# EAGLE board C64_1 (EAGLE 5.12)
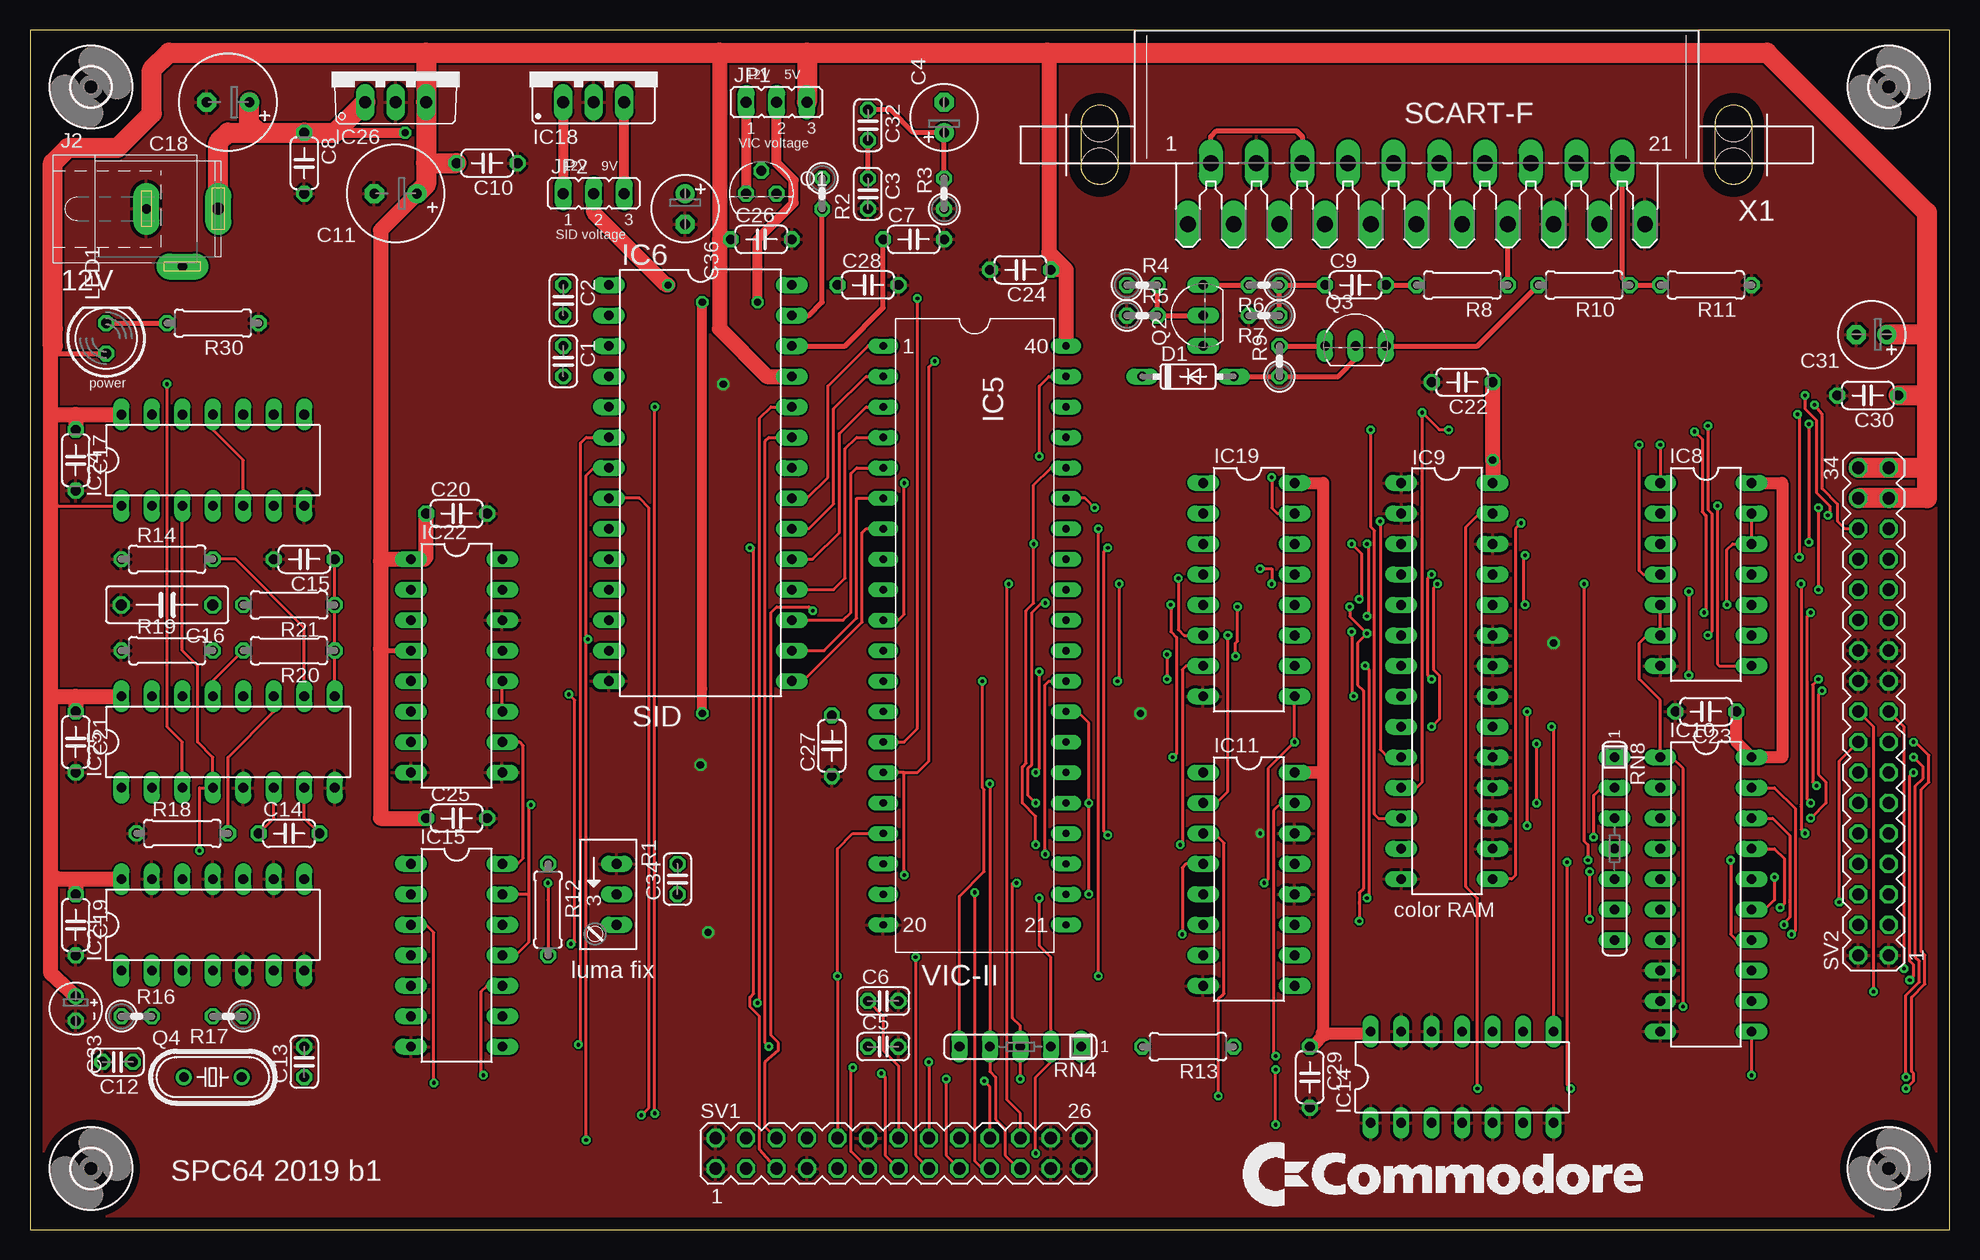
[diagram p0: board, top side]
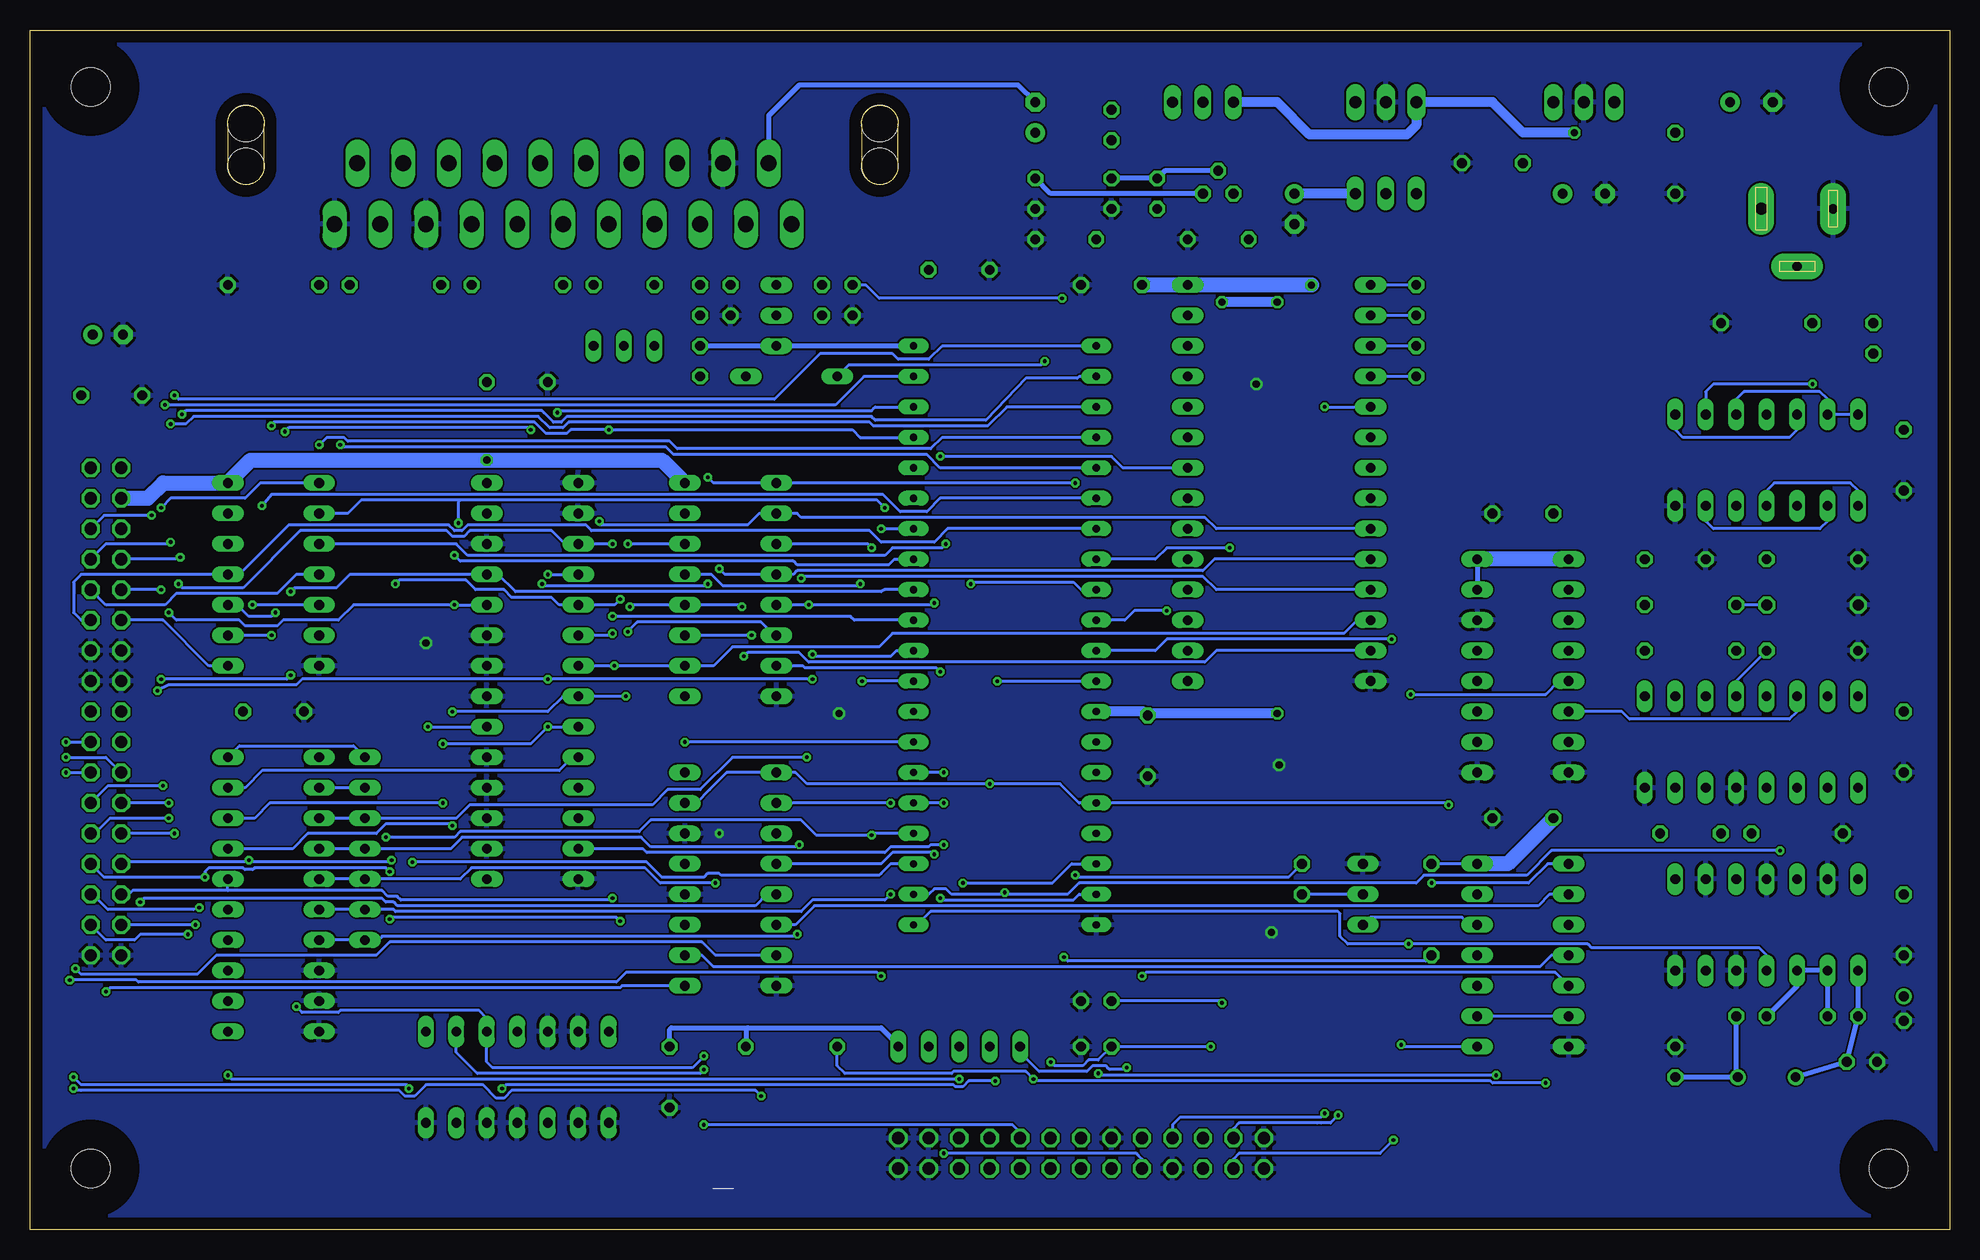
[diagram p1: board, bottom side, seen from below]

Size 160 x 100 mm. Coordinates in mm from the lower left corner, seen from the top.
Outline: 0,0 160,0 160,100 0,100 0,0
Copper layers (1*16): Top 0.035mm / dielectric 1.5mm / Bottom 0.035mm
Design rules "default *": minimum track width 10mil, minimum drill 12mil, track to track 6mil, track to pad 6mil, pad to pad 6mil, via to via 6mil, smd to smd 6mil, copper to edge 40mil, drill to drill 8mil, minimum pad ring 10mil, minimum via ring 8mil, stop-mask expansion 4mil, vias tented up to drill 0mil, thermal gap 10mil

## Footprints (pad centres in the part's own frame; a part is rotated, then mirrored left to right if it is on the bottom)
C025-024X044 = drill 0.813 octagon: 1 -1.27,0; 2 1.27,0
E2,5-6 = drill 0.813 pad 1.6 round: + -1.27,0 | drill 0.813 pad 1.6 octagon: - 1.27,0
C050-024X044 = drill 0.813 octagon: 1 -2.54,0; 2 2.54,0
E3,5-8 = drill 0.813 pad 1.6 round: + -1.778,0 | drill 0.813 pad 1.6 octagon: - 1.778,0
C075-032X103 = drill 0.914 octagon: 1 -3.81,0; 2 3.81,0
E2-4 = drill 0.813 pad 1.27 round: + -1.016,0 | drill 0.813 pad 1.27 octagon: - 1.016,0
DO35-7 = drill 0.813 long: A 3.81,0; C -3.81,0
DIP40 = drill 0.61 pad 1.27 long: 1 -24.13,-7.62; 2 -21.59,-7.62; 3 -19.05,-7.62; 4 -16.51,-7.62; 5 -13.97,-7.62; 6 -11.43,-7.62; 7 -8.89,-7.62; 8 -6.35,-7.62; 9 -3.81,-7.62; 10 -1.27,-7.62; 11 1.27,-7.62; 12 3.81,-7.62; 13 6.35,-7.62; 14 8.89,-7.62; 15 11.43,-7.62; 16 13.97,-7.62; 17 16.51,-7.62; 18 19.05,-7.62; 19 21.59,-7.62; 20 24.13,-7.62; 21 24.13,7.62; 22 21.59,7.62; 23 19.05,7.62; 24 16.51,7.62; 25 13.97,7.62; 26 11.43,7.62; 27 8.89,7.62; 28 6.35,7.62; 29 3.81,7.62; 30 1.27,7.62; 31 -1.27,7.62; 32 -3.81,7.62; 33 -6.35,7.62; 34 -8.89,7.62; 35 -11.43,7.62; 36 -13.97,7.62; 37 -16.51,7.62; 38 -19.05,7.62; 39 -21.59,7.62; 40 -24.13,7.62
DIL28 = drill 0.813 long: 1 -16.51,-7.62; 2 -13.97,-7.62; 3 -11.43,-7.62; 4 -8.89,-7.62; 5 -6.35,-7.62; 6 -3.81,-7.62; 7 -1.27,-7.62; 8 1.27,-7.62; 9 3.81,-7.62; 10 6.35,-7.62; 11 8.89,-7.62; 12 11.43,-7.62; 13 13.97,-7.62; 14 16.51,-7.62; 15 16.51,7.62; 16 13.97,7.62; 17 11.43,7.62; 18 8.89,7.62; 19 6.35,7.62; 20 3.81,7.62; 21 1.27,7.62; 22 -1.27,7.62; 23 -3.81,7.62; 24 -6.35,7.62; 25 -8.89,7.62; 26 -11.43,7.62; 27 -13.97,7.62; 28 -16.51,7.62
DIL14 = drill 0.813 long: 1 -7.62,-3.81; 2 -5.08,-3.81; 3 -2.54,-3.81; 4 0,-3.81; 5 2.54,-3.81; 6 5.08,-3.81; 7 7.62,-3.81; 8 7.62,3.81; 9 5.08,3.81; 10 2.54,3.81; 11 0,3.81; 12 -2.54,3.81; 13 -5.08,3.81; 14 -7.62,3.81
DIL28-3 = drill 0.813 long: 1 -16.51,-3.81; 2 -13.97,-3.81; 3 -11.43,-3.81; 4 -8.89,-3.81; 5 -6.35,-3.81; 6 -3.81,-3.81; 7 -1.27,-3.81; 8 1.27,-3.81; 9 3.81,-3.81; 10 6.35,-3.81; 11 8.89,-3.81; 12 11.43,-3.81; 13 13.97,-3.81; 14 16.51,-3.81; 15 16.51,3.81; 16 13.97,3.81; 17 11.43,3.81; 18 8.89,3.81; 19 6.35,3.81; 20 3.81,3.81; 21 1.27,3.81; 22 -1.27,3.81; 23 -3.81,3.81; 24 -6.35,3.81; 25 -8.89,3.81; 26 -11.43,3.81; 27 -13.97,3.81; 28 -16.51,3.81
DIL20 = drill 0.813 long: 1 -11.43,-3.81; 2 -8.89,-3.81; 3 -6.35,-3.81; 4 -3.81,-3.81; 5 -1.27,-3.81; 6 1.27,-3.81; 7 3.81,-3.81; 8 6.35,-3.81; 9 8.89,-3.81; 10 11.43,-3.81; 11 11.43,3.81; 12 8.89,3.81; 13 6.35,3.81; 14 3.81,3.81; 15 1.27,3.81; 16 -1.27,3.81; 17 -3.81,3.81; 18 -6.35,3.81; 19 -8.89,3.81; 20 -11.43,3.81
DIL16 = drill 0.813 long: 1 -8.89,-3.81; 2 -6.35,-3.81; 3 -3.81,-3.81; 4 -1.27,-3.81; 5 1.27,-3.81; 6 3.81,-3.81; 7 6.35,-3.81; 8 8.89,-3.81; 9 8.89,3.81; 10 6.35,3.81; 11 3.81,3.81; 12 1.27,3.81; 13 -1.27,3.81; 14 -3.81,3.81; 15 -6.35,3.81; 16 -8.89,3.81
78XXS = drill 1.016 long: GND 0,-2.54; IN -2.54,-2.54; OUT 2.54,-2.54
TO220V = drill 1.016 long: 1 -2.54,-2.54; 2 0,-2.54; 3 2.54,-2.54
SPC4077 = drill 0.8 pad 2.184 long: 1 -3,0; 2 0,-4.8 | drill 1 pad 2.184 long: 3 3,0
JP2 = drill 0.914 long: 1 -2.54,0; 2 0,0; 3 2.54,0
LED5MM = drill 0.813 octagon: A -1.27,0; K 1.27,0
TO92 = drill 0.813 octagon: 1 1.27,0; 2 0,1.905; 3 -1.27,0
TO92-EBC = drill 0.813 long: B 0,-1.27; C -2.54,-1.27; E 2.54,-1.27
HC49/S = drill 0.813 round: 1 -2.413,0; 2 2.413,0
RJ9W = drill 0.813 long: A 2.54,0.635; E -2.54,0.635; S 0,0.635
0207/2V = drill 0.813 octagon: 1 -1.27,0; 2 1.27,0
0207/7 = drill 0.813 octagon: 1 -3.81,0; 2 3.81,0
SIL5 = drill 0.813 long: 1 -5.08,0; 2 -2.54,0; 3 0,0; 4 2.54,0; 5 5.08,0
SIL7 = drill 0.813 long: 1 -7.62,0; 2 -5.08,0; 3 -2.54,0; 4 0,0; 5 2.54,0; 6 5.08,0; 7 7.62,0
MA13-2 = drill 1.016 octagon: 1 -15.24,-1.27; 2 -15.24,1.27; 3 -12.7,-1.27; 4 -12.7,1.27; 5 -10.16,-1.27; 6 -10.16,1.27; 7 -7.62,-1.27; 8 -7.62,1.27; 9 -5.08,-1.27; 10 -5.08,1.27; 11 -2.54,-1.27; 12 -2.54,1.27; 13 0,-1.27; 14 0,1.27; 15 2.54,-1.27; 16 2.54,1.27; 17 5.08,-1.27; 18 5.08,1.27; 19 7.62,-1.27; 20 7.62,1.27; 21 10.16,-1.27; 22 10.16,1.27; 23 12.7,-1.27; 24 12.7,1.27; 25 15.24,-1.27; 26 15.24,1.27
MA17-2 = drill 1.016 octagon: 1 -20.32,-1.27; 2 -20.32,1.27; 3 -17.78,-1.27; 4 -17.78,1.27; 5 -15.24,-1.27; 6 -15.24,1.27; 7 -12.7,-1.27; 8 -12.7,1.27; 9 -10.16,-1.27; 10 -10.16,1.27; 11 -7.62,-1.27; 12 -7.62,1.27; 13 -5.08,-1.27; 14 -5.08,1.27; 15 -2.54,-1.27; 16 -2.54,1.27; 17 0,-1.27; 18 0,1.27; 19 2.54,-1.27; 20 2.54,1.27; 21 5.08,-1.27; 22 5.08,1.27; 23 7.62,-1.27; 24 7.62,1.27; 25 10.16,-1.27; 26 10.16,1.27; 27 12.7,-1.27; 28 12.7,1.27; 29 15.24,-1.27; 30 15.24,1.27; 31 17.78,-1.27; 32 17.78,1.27; 33 20.32,-1.27; 34 20.32,1.27
3,2 = hole 3.2: 0,0
SCART-F = drill 1.321 long: 1 19.05,5.08; 2 17.145,0; 3 15.24,5.08; 4 13.335,0; 5 11.43,5.08; 6 9.525,0; 7 7.62,5.08; 8 5.715,0; 9 3.81,5.08; 10 1.905,0; 11 0,5.08; 12 -1.905,0; 13 -3.81,5.08; 14 -5.715,0; 15 -7.62,5.08; 16 -9.525,0; 17 -11.43,5.08; 18 -13.335,0; 19 -15.24,5.08; 20 -17.145,0; 21 -19.05,5.08 | hole 3.023: 26.416,0.254; 26.416,-3.302; -26.416,0.254; -26.416,-3.302

## Placement (x,y rotation side)
C1  2n2  [C025-024X044]  44.45,72.39 270 top
C2  2n2  [C025-024X044]  44.45,77.47 270 top
C3  1n  [C025-024X044]  69.85,86.36 270 top
C4  10µ  [E2,5-6]  76.2,92.71 90 top
C5  1n8  [C025-024X044]  71.12,15.24 0 top
C6  1n8  [C025-024X044]  71.12,19.05 0 top
C7  47n  [C050-024X044]  73.66,82.55 0 top
C8  100n  [C050-024X044]  22.86,88.9 270 top
C9  470p  [C050-024X044]  110.49,78.74 0 top
C10  100n  [C050-024X044]  38.1,88.9 180 top
C11  470µ  [E3,5-8]  30.48,86.36 180 top
C12  12p  [C025-024X044]  7.3,13.97 180 top
C13  12p  [C025-024X044]  22.86,13.97 90 top
C14  220p  [C050-024X044]  21.59,33.02 0 top
C15  680p  [C050-024X044]  22.86,55.88 180 top
C16  330n  [C075-032X103]  11.43,52.07 180 top
C17  100n  [C050-024X044]  3.81,64.14 270 top
C18  470µ  [E3,5-8]  16.51,93.98 180 top
C19  100n  [C050-024X044]  3.81,25.4 270 top
C20  100n  [C050-024X044]  35.56,59.69 0 top
C21  100n  [C050-024X044]  3.81,40.64 270 top
C22  100n  [C050-024X044]  119.38,70.64 180 top
C23  100n  [C050-024X044]  139.7,43.18 180 top
C24  100n  [C050-024X044]  82.55,80.01 180 top
C25  100n  [C050-024X044]  35.56,34.29 0 top
C26  100n  [C050-024X044]  60.96,82.55 0 top
C27  100n  [C050-024X044]  66.83,40.32 90 top
C28  100n  [C050-024X044]  69.85,78.74 0 top
C29  100n  [C050-024X044]  106.68,12.7 270 top
C30  100n  [C050-024X044]  153.19,69.53 180 top
C31  100µ  [E2,5-6]  153.51,74.61 180 top
C32  470p  [C025-024X044]  69.85,92.08 270 top
C33  10µ  [E2-4]  3.81,18.41 270 top
C34  47p  [C025-024X044]  53.98,29.21 90 top
C36  100µ  [E2,5-6]  54.61,85.09 270 top
D1  1N4148  [DO35-7]  96.52,71.12 0 top
IC5  6569 VIC-II  [DIP40]  78.74,49.53 270 top
IC6  6582/8580 SID  [DIL28]  55.88,62.23 270 top
IC8  74HC4066  [DIL14]  139.7,54.61 270 top
IC9  61256  [DIL28-3]  118.11,45.72 270 top
IC10  74HC573  [DIL20]  139.7,27.94 270 top
IC11  74HC367  [DIL16]  101.6,29.21 270 top
IC14  74HC08  [DIL14]  119.38,12.7 0 top
IC15  74HC04  [DIL14]  35.56,22.86 270 top
IC18  7809  [78XXS]  46.99,96.52 0 top
IC19  74HC367  [DIL16]  101.6,53.34 270 top
IC21  74HCU04  [DIL14]  15.24,25.4 0 top
IC22  74HC193  [DIL16]  35.56,46.99 270 top
IC24  74HC74  [DIL14]  15.24,64.14 0 top
IC25  74HC4046  [DIL16]  16.51,40.64 0 top
IC26  7805TV  [TO220V]  30.48,96.52 0 top
J2  12V  [SPC4077]  12.7,85.09 0 top
JP1  VIC voltage  [JP2]  62.23,93.98 0 top
JP2  SID voltage  [JP2]  46.99,86.36 0 top
LED1  power  [LED5MM]  6.35,74.3 90 top
Q1  BC337-40  [TO92]  60.96,86.36 0 top
Q2  BC550  [TO92-EBC]  96.52,76.2 90 top
Q3  BC550  [TO92-EBC]  110.49,74.93 0 top
Q4  17.73447 MHz  [HC49/S]  15.24,12.7 0 top
R1  2K2  [RJ9W]  48.26,27.94 270 top
R2  10K  [0207/2V]  66.04,86.36 270 top
R3  1K  [0207/2V]  76.2,86.36 90 top
R4  510  [0207/2V]  92.71,78.74 0 top
R5  510  [0207/2V]  92.71,76.2 0 top
R6  68  [0207/2V]  102.87,78.74 180 top
R7  270  [0207/2V]  102.87,76.2 180 top
R8  300  [0207/7]  119.38,78.74 180 top
R9  1K  [0207/2V]  104.14,72.39 90 top
R10  150  [0207/7]  129.54,78.74 180 top
R11  150  [0207/7]  139.7,78.74 180 top
R12  3K3  [0207/7]  43.18,26.67 270 top
R13  3K3  [0207/7]  96.52,15.24 180 top
R14  10K  [0207/7]  11.43,55.88 0 top
R16  1M  [0207/2V]  8.89,17.78 0 top
R17  470  [0207/2V]  16.51,17.78 180 top
R18  10K  [0207/7]  12.7,33.02 0 top
R19  5K6  [0207/7]  11.43,48.26 0 top
R20  1K5  [0207/7]  21.59,48.26 180 top
R21  3K3  [0207/7]  21.59,52.07 180 top
R30  470  [0207/7]  15.24,75.56 180 top
RN4  3K3  [SIL5]  82.55,15.24 180 top
RN8  3K3  [SIL7]  132.08,31.75 270 top
SV1  [MA13-2]  72.39,6.35 0 top
SV2  [MA17-2]  153.67,43.18 90 top
U$1  [3,2]  154.94,5.08 0 top
U$2  [3,2]  5.08,5.08 0 top
U$3  [3,2]  5.08,95.25 0 top
U$4  [3,2]  154.94,95.25 0 top
X1  SCART-F  [SCART-F]  115.57,88.9 180 top

## Library data of the parts
C1-C34 C36 R2-R14 R16-R21 R30 = rcl
D1 = diode
IC5 IC6 = 0RB_65xx
IC8 IC25 = 40xx
IC9 = memory-hitachi; OC_FARNELL: unknown; OC_NEWARK: unknown
IC10 IC11 IC14 IC15 IC19 IC21 IC22 IC24 = 74xx-us
IC18 = v-reg
IC26 = linear
J2 = con-jack; OC_FARNELL: unknown; OC_NEWARK: unknown
JP1 JP2 = jumper
LED1 = led
Q1-Q3 = transistor-npn
Q4 = crystal; OC_FARNELL: 1667008; OC_NEWARK: unknown
R1 = pot
RN4 RN8 = resistor-sil; OC_FARNELL: unknown; OC_NEWARK: unknown
SV1 SV2 = con-lstb; OC_FARNELL: unknown; OC_NEWARK: unknown
U$1-U$4 = holes
X1 = con-hirschmann; OC_FARNELL: unknown; OC_NEWARK: unknown

## Nets
/AEC: IC15.10 SV1.13
/BA: IC5.12 RN4.5 SV1.11
/CAS: IC5.19 RN4.2 SV1.9
/COLOR: IC14.9 SV1.18
/CS_COLOR: IC9.20 IC14.8
/IRQ: IC5.8 SV1.5
/RAS: IC5.18 IC10.11 RN4.3
/RESET: IC6.5 SV1.8
/SID: IC6.8 SV1.4
/VA14: IC15.1 R12.2 SV1.15
/VA15: IC15.3 R13.2 SV1.17
/VIC: IC5.10 IC19.1 IC19.15 SV1.6
A0: IC6.9 IC9.10 IC10.19 IC19.2 SV2.3
A1: IC6.10 IC9.9 IC10.18 IC19.4 SV2.4
A2: IC6.11 IC9.8 IC10.17 IC19.6 SV2.5
A3: IC6.12 IC9.7 IC10.16 IC19.10 SV2.6
A4: IC6.13 IC9.6 IC10.15 IC19.12 SV2.7
A5: IC9.5 IC10.14 IC19.14 SV2.8
A6: IC5.30 IC9.4 SV2.9
A7: IC5.31 IC9.3 SV2.10
A8: IC5.32 IC9.25 SV2.11
A9: IC5.33 IC9.24 SV2.12
A10: IC5.34 SV2.13
A11: IC5.23 SV2.14
A12: IC11.3 SV2.15
A13: IC11.5 SV2.16
A14: IC11.7 SV2.17
A15: IC11.9 SV2.18
AEC: IC5.16 IC8.5 IC8.6 IC8.12 IC8.13 IC10.1 IC11.1 IC11.15 IC14.10 IC15.11 IC15.13 RN4.4 SV1.21
AUDIO_OUT: C4.- X1.2 X1.6
COLCLK: IC5.21 IC21.4 IC22.5
COLCLK/9: IC22.6 IC25.14
COLOR: IC5.14 R4.1
COLOR_OUT: R8.1 X1.15
D0: IC5.7 IC6.15 IC8.11 SV2.23
D1: IC5.6 IC6.16 IC8.8 SV2.24
D2: IC5.5 IC6.17 IC8.4 SV2.25
D3: IC5.4 IC6.18 IC8.1 SV2.26
D4: IC5.3 IC6.19 SV2.27
D5: IC5.2 IC6.20 SV2.28
D6: IC5.1 IC6.21 SV2.29
D7: IC5.39 IC6.22 SV2.30
D8: IC5.38 IC8.10 IC9.11
D9: IC5.37 IC8.9 IC9.12
D10: IC5.36 IC8.3 IC9.13
D11: IC5.35 IC8.2 IC9.15
DOTCLK: IC5.22 IC24.3 IC25.4 SV1.19
EXT-IN: C7.1 IC6.26
GND: C3.2 C5.2 C6.2 C7.2 C8.2 C10.1 C11.- C12.2 C13.2 C15.2 C16.2 C17.2 C18.- C19.2 C20.2 C21.2 C22.2 C23.2 C24.2 C25.2 C26.2 C27.1 C28.2 C29.2 C30.2 C31.- C33.- C36.- IC5.20 IC6.14 IC8.7 IC9.1 IC9.2 IC9.14 IC9.16 IC9.17 IC9.18 IC9.19 IC9.21 IC9.22 IC9.23 IC9.26 IC10.8 IC10.9 IC10.10 IC11.8 IC11.12 IC11.14 IC14.1 IC14.2 IC14.4 IC14.5 IC14.7 IC14.12 IC14.13 IC15.7 IC18.GND IC19.8 IC21.5 IC21.7 IC21.9 IC21.11 IC21.13 IC22.8 IC22.9 IC22.14 IC24.7 IC25.5 IC25.8 IC26.2 J2.1 R1.E R3.1 R5.1 R7.2 R11.1 R14.1 R18.1 R19.1 R30.1 SV1.1 SV1.2 SV1.7 SV1.12 SV1.23 SV1.24 SV1.25 SV1.26 SV2.1 SV2.2 SV2.19 SV2.20 SV2.21 SV2.22 X1.4 X1.17 X1.21
GR/W: IC9.27 SV1.20
LUM_SYNC_OUT: R10.1 R11.2 X1.20
MA0: IC5.24 IC10.2 IC19.3 RN8.2
MA1: IC5.25 IC10.3 IC19.5 RN8.3
MA2: IC5.26 IC10.4 IC19.7 RN8.4
MA3: IC5.27 IC10.5 IC19.9 RN8.5
MA4: IC5.28 IC10.6 IC11.2 IC19.11 RN8.6
MA5: IC5.29 IC10.7 IC11.4 IC19.13 RN8.7
N$1: C2.1 IC6.1
N$2: C2.2 IC6.2
N$3: C1.2 IC6.4
N$4: C1.1 IC6.3
N$5: IC6.27 R2.2
N$6: C4.+ C32.1 Q1.1 R3.2
N$7: C3.1 C32.2 Q1.2 R2.1
N$8: LED1.K R30.2
N$9: IC15.6 IC15.9
N$10: Q2.B R4.2 R5.2
N$11: Q2.E R6.2
N$12: C9.1 R6.1 R7.1
N$13: C9.2 R8.2
N$14: C34.1 R1.S
N$15: D1.A Q3.B R9.1
N$16: IC15.12 R1.A
N$17: IC25.10 R14.2
N$18: C16.1 R21.2
N$19: Q3.E R10.2
N$20: IC21.2 IC21.3 R16.2 R17.2
N$21: C12.1 IC21.1 Q4.1 R16.1
N$22: C13.1 Q4.2 R17.1
N$25: IC24.2 IC24.6
N$26: IC22.11 IC22.12
N$28: IC24.8 IC24.12
N$31: IC24.5 IC24.11
N$33: IC24.9 IC25.3
N$35: IC25.11 R18.2
N$36: IC25.13 R20.2
N$37: IC25.12 R19.2
N$38: C14.1 IC25.6
N$39: C14.2 IC25.7
N$40: C15.1 IC25.9 R20.1 R21.1
PHI0: IC5.17 IC15.5 SV1.10
POTX: C6.1 IC6.24 SV1.14
POTY: C5.1 IC6.23 SV1.16
R/W: IC5.11 IC6.7 SV1.3
ROW4: IC5.9 SV1.22
SID_PHI2: IC6.6 IC15.8
SYNC: C34.2 D1.C IC5.15
V9: C36.+ IC18.OUT JP2.3
V12: C8.1 C18.+ IC18.IN IC26.1 J2.3 JP1.1 JP2.1 Q1.3
V_SID: C28.1 IC6.28 JP2.2
V_VIC: C27.2 IC5.13 JP1.2
VA14: IC11.6 IC15.2
VA15: IC11.10 IC15.4
VCC: C10.2 C11.+ C17.1 C19.1 C20.1 C21.1 C22.1 C23.1 C24.1 C25.1 C26.1 C29.1 C30.1 C31.+ C33.+ IC5.40 IC6.25 IC8.14 IC9.28 IC10.20 IC11.16 IC14.14 IC15.14 IC19.16 IC21.14 IC22.1 IC22.4 IC22.10 IC22.15 IC22.16 IC24.1 IC24.4 IC24.10 IC24.13 IC24.14 IC25.16 IC26.3 JP1.3 LED1.A Q2.C Q3.C R9.2 R12.1 R13.1 RN4.1 RN8.1 SV2.31 SV2.32 SV2.33 SV2.34

## Tracks (layer width: path | path; a pad name or v marks a point on that pad's centre or on a via)
/AEC  (via drill 0.3)
  Top 0.254: SV1.13 71.28,6.19 71.28,12.7 v70.96,13.02 | v37.78,12.86 37.62,13.02 37.62,19.84 38.1,20.32 IC15.10
  Bottom 0.254: v37.78,12.86 70.8,12.86 v70.96,13.02 | v70.96,13.02
/BA  (via drill 0.3)
  Top 0.254: v68.58,13.49 68.42,13.34 68.42,6.51 SV1.11 | RN4.5 77.47,27.78 79.53,29.84 79.53,36.67 79.38,36.83 v79.38,45.72
  Bottom 0.254: RN4.5 77.47,14.76 75.88,13.18 71.91,13.18 71.44,13.65 70.33,13.65 70.17,13.49 | 70.17,13.49 | 70.17,13.49 70.01,13.34 68.42,13.34 v68.58,13.49 | v79.38,45.72 IC5.12
/CAS  (via drill 0.3)
  Top 0.254: v83.82,6.35 83.82,12.7 85.09,13.97 RN4.2 85.09,22.7 84.14,23.65 v84.14,27.62
  Bottom 0.254: SV1.9 67.31,5.87 67.63,6.19 67.79,6.35 v83.82,6.35 | v84.14,27.62 83.98,27.46 73.03,27.46 72.55,27.94 IC5.19
/COLOR  (via drill 0.3)
  Top 0.254: v103.82,8.73 v103.82,13.34
  Bottom 0.254: SV1.18 77.47,8.1 78.11,8.73 v103.82,8.73 | v103.82,13.34 | v103.82,13.34 104.14,13.02 122.71,13.02 124.46,14.76 IC14.9
/CS_COLOR  (via drill 0.3)
  Top 0.254: IC14.8 127,41.75 v126.84,41.91
  Bottom 0.254: v126.84,41.91 IC9.20
/IRQ  (via drill 0.3)
  Top 0.254: 60.33,56.83 v60.01,56.83 | 60.33,56.83 | 60.33,56.83 60.33,19.68 60.01,19.37 60.01,18.57 60.8,17.78 60.8,6.67 SV1.5
  Bottom 0.254: IC5.8 66.2,55.88 65.25,56.83 v60.01,56.83
/RAS  (via drill 0.3)
  Top 0.254: v143.51,12.86 IC10.11 | v82.55,12.54 RN4.3 82.55,16.99 81.92,17.62 81.92,28.89 v82.23,28.89
  Bottom 0.254: v82.55,12.54 143.19,12.54 v143.51,12.86 | IC5.18 72.39,30.48 73.18,30.48 74.77,28.89 v82.23,28.89
/RESET  (via drill 0.3)
  Top 0.254: v52.07,68.58 52.07,9.53 v52.07,9.68
  Bottom 0.254: v52.07,68.58 IC6.5 | v52.07,9.68 52.39,9.37 64.14,9.37 64.77,8.73 SV1.8
/SID  (via drill 0.3)
  Top 0.254: v50.96,9.53 51.59,10.16 51.59,60.17 50.8,60.96 IC6.8
  Bottom 0.254: SV1.4 59.69,8.41 59.21,8.89 52.7,8.89 52.39,8.89 51.59,8.89 v50.96,9.53
/VA14  (via drill 0.3)
  Top 0.254: v43.18,28.89 43.18,27.46 R12.2 | v73.82,22.7 73.82,6.19 SV1.15
  Bottom 0.254: IC15.1 33.5,30.48 35.08,28.89 v43.18,28.89 | R12.2 43.66,22.38 73.5,22.38 v73.82,22.7
/VA15  (via drill 0.3)
  Top 0.254: IC15.3 33.02,25.4 33.66,24.77 v33.66,12.22 | v76.36,12.54 76.36,6.19 SV1.17
  Bottom 0.254: v33.66,12.22 38.1,12.22 38.26,12.38 76.2,12.38 v76.36,12.54 76.99,13.18 83.03,13.18 83.19,13.02 92.08,13.02 92.71,13.65 R13.2
/VIC  (via drill 0.3)
  Top 0.254: v103.5,62.71 103.5,60.17 103.98,59.69 IC19.15 | v72.87,62.23 72.87,51.28 72.39,50.8 IC5.10 | v65.25,51.59 | v65.25,51.59 64.93,51.91 62.23,51.91 61.75,51.44 61.75,16.19 62.39,15.56 62.39,14.92 61.28,13.97 61.28,8.57 SV1.6
  Bottom 0.254: v103.5,62.71 103.03,62.23 IC19.1 v72.87,62.23 | IC5.10 68.74,50.8 67.94,51.59 v65.25,51.59
A0  (via drill 0.3)
  Top 0.254: IC10.19 145.41,36.83 147.16,35.08 147.16,27.46 147.16,27.15 147.16,24.92 v146.84,24.61 | v112.55,59.05 112.55,40.01 113.19,39.37 IC9.10
  Bottom 0.254: IC6.9 61.12,58.42 62.07,59.37 95.73,59.37 96.04,59.69 IC19.2 99.22,59.69 100.17,58.74 112.55,58.74 v112.55,59.05 | v146.84,24.61 150.81,24.61 151.29,24.13 153.67,24.13 SV2.3 | IC9.10 114.78,39.37 115.89,38.26 140.65,38.26 142.08,36.83 IC10.19
A1  (via drill 0.3)
  Top 0.254: v146.21,25.4 146.21,25.56 146.69,26.04 146.69,27.3 146.69,27.46 146.69,32.86 145.26,34.29 IC10.18 | v102.55,55.09 103.5,55.09 v103.5,53.82 | v117.32,53.82 117,53.5 117,46.67 117.47,46.2 117.47,42.55 v116.84,41.91 | v125.57,40.48 v125.57,35.56
  Bottom 0.254: IC6.10 61.28,55.88 62.07,55.09 | 62.07,55.09 | 62.07,55.09 62.23,54.93 96.04,54.93 96.36,54.61 IC19.4 102.08,54.61 102.39,54.93 | v146.21,25.4 SV2.4 | 102.39,54.93 | 102.39,54.93 v102.55,55.09 | v103.5,53.82 103.5,53.66 117.16,53.66 v117.32,53.82 | IC9.9 v116.84,41.91 118.27,40.48 v125.57,40.48 | IC10.18 141.29,34.29 140.02,35.56 v125.57,35.56
A2  (via drill 0.3)
  Top 0.254: v95.73,54.29 95.73,50.01 96.2,49.53 IC19.6 | v145.89,26.83 | v145.89,26.83 146.21,27.15 146.21,30.96 145.41,31.75 IC10.17 | v110.17,49.85 110.17,44.61 v110.33,44.45 | v124.78,43.18 v124.78,33.66
  Bottom 0.254: IC6.11 61.12,53.34 62.23,54.45 95.57,54.45 v95.73,54.29 | SV2.5 154.78,27.94 153.51,26.67 146.37,26.67 v145.89,26.83 | IC19.6 97.95,49.53 99.06,50.64 109.38,50.64 v110.17,49.85 | v110.33,44.45 IC9.8 115.57,44.45 116.84,43.18 v124.78,43.18 | IC10.17 138.11,31.75 136.84,33.02 131.13,33.02 130.33,33.81 124.94,33.81 v124.78,33.66
A3  (via drill 0.3)
  Top 0.254: v111.44,27.62 111.6,27.78 111.6,46.67 v111.28,46.99
  Bottom 0.254: IC6.12 49.37,50.8 50.48,49.69 88.11,49.69 89.22,48.58 101.44,48.58 103.03,46.99 IC19.10 v111.28,46.99 IC9.7 | 143.51,28.26 151.45,28.26 151.76,27.94 SV2.6 | 143.51,28.26 IC10.16 | 143.51,28.26 130.65,28.26 130.18,27.78 129.38,27.78 129.06,27.46 111.6,27.46 v111.44,27.62
A4  (via drill 0.3)
  Top 0.254: v145.41,29.37 145.41,27.46 144.62,26.67 IC10.15 | v110.01,51.91 110.01,51.12 v111.44,49.69 110.65,48.9 110.65,45.4 111.12,44.93 111.12,28.42 110.81,28.1 110.81,27.3 110.81,27.15 v110.81,25.72 | v100.49,47.78 100.49,48.9 100.65,49.05 v100.65,51.91 | v130.02,25.88 v130.02,29.84
  Bottom 0.254: SV2.7 153.83,29.37 v145.41,29.37 145.41,29.84 145.1,30.16 142.24,30.16 142.08,30 141.45,30 141.29,30.16 130.33,30.16 v130.02,29.84 | v110.01,51.91 109.86,52.07 IC19.12 100.81,52.07 v100.65,51.91 | v110.01,51.91 | v111.44,49.69 111.6,49.53 IC9.6 | IC6.13 61.12,48.26 62.07,47.31 95.09,47.31 95.89,48.1 100.17,48.1 v100.49,47.78 | v130.02,25.88 129.86,26.04 111.12,26.04 v110.81,25.72
A5  (via drill 0.3)
  Top 0.254: v141.76,30.8 141.76,24.61 142.24,24.13 IC10.14 | v110.81,52.55 | v110.81,52.55 110.97,52.7 110.97,56.36 v110.17,57.15 | v129.86,30.8 129.86,32.07 129.54,32.38 v129.54,53.82
  Bottom 0.254: SV2.8 152.4,30.64 141.92,30.64 v141.76,30.8 | v110.81,52.55 111.28,52.07 IC9.5 115.89,52.07 116.52,52.7 119.86,52.7 120.49,53.34 122.87,53.34 123.67,54.13 129.22,54.13 v129.54,53.82 | IC19.14 v110.17,57.15 | v141.76,30.8 | v141.76,30.8 141.6,30.64 130.02,30.64 v129.86,30.8
A6  (via drill 0.3)
  Top 0.254: v94.77,47.94 v94.77,45.88 | v116.84,45.88 | v116.84,45.88 116.52,46.2 116.52,54.29 v116.84,54.61 | v148.43,34.29 149.7,35.56 149.7,37.31 149.07,37.94 149.07,44.61 v149.38,44.93 | v148.43,34.29
  Bottom 0.254: IC5.30 87.79,48.26 88.27,47.78 94.61,47.78 v94.77,47.94 | v94.77,45.88 v116.84,45.88 137.32,45.88 137.79,45.4 148.43,45.4 v149.38,44.93 | v116.84,54.61 IC9.4 | SV2.9 154.62,33.02 153.35,34.29 v148.43,34.29
A7  (via drill 0.3)
  Top 0.254: v111.44,51.12 111.44,51.28 111.6,51.44 111.6,56.99 v111.44,57.15 | v147.64,53.82 147.64,35.4 147.64,35.24 147.64,33.34 v147.96,33.02
  Bottom 0.254: IC5.31 91.28,50.8 91.6,51.12 v111.44,51.12 | v111.44,57.15 IC9.3 115.41,57.15 116.52,58.26 123.35,58.26 123.83,57.78 124.78,57.78 125.25,58.26 137.48,58.26 142.24,53.5 147.32,53.5 v147.64,53.82 | v147.96,33.02 SV2.10
A8  (via drill 0.3)
  Top 0.254: v138.27,53.18 v138.27,46.2 | v149.07,45.88 148.59,45.4 148.59,37.31 v148.91,36.99 | v148.91,36.99
  Bottom 0.254: IC5.32 88.74,53.34 89.06,53.18 119.54,53.18 120.97,54.61 IC9.25 133.35,54.61 134.46,53.5 137.95,53.5 v138.27,53.18 | v138.27,46.2 138.59,45.88 v149.07,45.88 | v148.91,36.99 153.51,36.99 SV2.11
A9  (via drill 0.3)
  Top 0.254: v124.62,56.2 | v124.62,56.2 124.46,56.04 124.46,52.23 v124.62,52.07 | v148.43,51.44 148.11,51.12 148.11,35.88 v148.43,35.56
  Bottom 0.254: IC5.33 87.95,55.88 88.42,55.4 96.04,55.4 96.36,55.72 124.14,55.72 v124.62,56.2 | IC9.24 v124.62,52.07 133.03,52.07 134.3,50.8 138.91,50.8 139.38,50.32 142.08,50.32 142.56,50.8 147.8,50.8 v148.43,51.44 | v148.43,35.56 SV2.12
A10  (via drill 0.3)
  Top 0.254: v89.06,21.11 v89.06,58.42 | v156.69,20.8 | v156.69,20.8 157,21.11 157,22.07 156.69,22.38 156.69,37.78 v157,38.1
  Bottom 0.254: v89.06,58.42 IC5.34 | v89.06,21.11 89.38,21.43 110.33,21.43 111.12,20.64 150.97,20.64 151.13,20.8 v156.69,20.8 | v157,38.1 SV2.13
A11  (via drill 0.3)
  Top 0.254: v128.11,30.64 128.11,12.06 v128.43,11.75 | v156.37,12.7 156.37,19.53 157.48,20.64 157.48,22.38 157.16,22.7 157.16,36.99 157.8,37.62 157.8,38.58 v157,39.37
  Bottom 0.254: IC5.23 88.27,30.48 89.06,29.69 | 89.06,29.69 | 89.06,29.69 89.22,29.53 102.39,29.53 102.55,29.69 103.5,29.69 103.82,29.37 107.31,29.37 108.58,30.64 v128.11,30.64 | v128.43,11.75 128.43,11.91 128.59,12.06 155.73,12.06 v156.37,12.7 | v156.37,12.7 | v157,39.37 153.67,39.37 SV2.14
A12  (via drill 0.3)
  Top 0.254: v157,40.64 157.16,40.64 158.12,39.69 | 158.12,39.69 | 158.12,39.69 158.27,39.53 158.27,37.31 157.64,36.67 157.64,23.18 157.96,22.86 157.96,20.48 156.84,19.37 156.84,13.18 157,13.02 157,12.38 v156.37,11.75 | v99.06,11.11 99.06,19.21 99.38,19.53 99.54,19.68 99.54,32.23 98.74,33.02 IC11.3
  Bottom 0.254: v157,40.64 SV2.15 | v156.37,11.75 156.21,11.59 155.73,11.59 129.22,11.59 128.75,11.11 127.95,11.11 127,12.06 122.24,12.06 121.13,10.95 120.49,10.95 119.86,11.59 99.54,11.59 v99.06,11.11
A13  (via drill 0.3)
  Top 0.254: v150.81,27.3 150.81,39.05 SV2.16
  Bottom 0.254: IC11.5 98.58,27.94 99.54,26.99 129.38,26.99 129.7,27.3 130.33,27.3 130.65,27.62 150.5,27.62 v150.81,27.3
A14  (via drill 0.3)
  Top 0.254: v156.21,21.75 156.21,41.91 SV2.17
  Bottom 0.254: IC11.7 102.87,22.86 103.98,23.97 130.02,23.97 131.13,22.86 144.46,22.86 146.05,21.27 155.73,21.27 v156.21,21.75
A15  (via drill 0.3)
  Top 0.254: v153.67,19.84 153.67,41.91 SV2.18
  Bottom 0.254: IC11.9 110.65,20.32 110.81,20.16 153.35,20.16 v153.67,19.84
AEC  (via drill 0.3)
  Top 0.254: v41.75,35.4 41.59,35.24 41.59,27.94 | IC15.11 40.48,22.86 41.59,23.97 41.59,27.94 | IC8.5 IC8.6 134.78,49.53 134.14,48.9 134.14,45.88 135.89,44.13 IC10.1 136.84,39.37 137.79,38.42 v137.79,18.57 | IC8.13 IC8.12 141.92,57.15 141.45,56.67 v141.45,52.07 | v80.01,37.15 RN4.4 80.01,13.18 80.49,12.7 80.49,9.21 81.28,8.41 81.28,6.19 82.39,5.08 SV1.21 | v103.82,14.45 103.66,14.61 103.66,34.92 104.38,35.64 105.33,35.64 IC11.15 | 41.59,27.94 IC15.13
  Bottom 0.254: IC11.15 104.46,35.56 103.35,36.67 101.92,38.1 IC11.1 96.2,38.1 95.25,37.15 v80.01,37.15 74.14,37.15 72.55,35.56 IC5.16 41.91,35.56 v41.75,35.4 | IC8.5 v141.45,52.07 | v103.82,14.45 104.78,13.49 121.44,13.49 121.92,13.97 IC14.10 121.92,17.62 122.56,18.26 134.14,18.26 134.3,18.1 137.32,18.1 v137.79,18.57
AUDIO_OUT
  Top 0.406: X1.6 106.05,91.12 105.57,91.6 98.9,91.6 98.42,91.12 X1.2
  Bottom 0.406: X1.2 98.42,92.87 95.89,95.41 77.63,95.41 C4.-
COLCLK  (via drill 0.3)
  Top 0.254: v44.93,44.61 45.4,44.13 45.4,23.97 45.24,23.81 v45.09,23.81
  Bottom 0.254: v44.93,44.61 33.66,44.61 32.54,45.72 IC22.5 | IC21.4 15.24,22.86 15.88,23.5 29.84,23.5 30.16,23.81 v45.09,23.81 50.16,23.81 50.8,24.45 50.8,26.35 50.96,26.51 84.93,26.51 86.04,25.4 IC5.21
COLCLK/9
  Bottom 0.254: IC22.6 27.3,43.18 26.67,42.55 13.34,42.55 12.7,43.18 IC25.14
COLOR  (via drill 0.3)
  Top 0.254: v73.98,77.63 73.98,41.75 72.87,40.64 IC5.14
  Bottom 0.254: R4.1 90.33,78.74 89.22,77.63 v73.98,77.63
COLOR_OUT
  Top 0.406: R8.1 X1.15
D0
  Top 0.254: IC5.7 69.69,58.42 69.53,58.26 | 69.53,58.26 | 69.53,58.26 69.37,58.1 69.37,50.64 64.45,45.72 IC6.15
  Bottom 0.254: SV2.23 155.73,50.8 156.37,51.44 156.37,53.98 155.73,54.61 IC8.11 142.56,54.61 138.43,58.74 125.09,58.74 124.62,58.26 123.98,58.26 123.51,58.74 113.67,58.74 113.19,58.26 90.01,58.26 89.06,57.31 | IC5.7 83.5,58.42 84.61,57.31 89.06,57.31 | 89.06,57.31
D1  (via drill 0.3)
  Top 0.254: IC5.6 68.9,60.96 68.9,50.96 66.2,48.26 IC6.16 | v140.65,60.33 140.65,52.7 140.65,47.15 140.81,46.99 IC8.8
  Bottom 0.254: SV2.24 148.91,50.8 145.1,46.99 IC8.8 | IC5.6 84.14,60.96 85.25,59.85 87.47,59.85 88.9,61.28 139.86,61.28 v140.65,60.33
D2  (via drill 0.3)  (2 unrouted)
  Top 0.254: IC5.5 68.9,63.5 68.42,63.02 68.42,51.44 67.79,50.8 IC6.17 | v134.14,65.41 134.14,54.93 134.46,54.61 IC8.4
  Bottom 0.254: IC5.5 84.14,63.5 85.25,64.61 106.36,64.61 106.84,65.09 | IC8.4 137.79,54.61 139.38,53.02 147.8,53.02 148.75,52.07 153.67,52.07 SV2.25 | 106.84,65.09 | 106.84,65.09 107,65.25 133.99,65.25 v134.14,65.41
D3  (via drill 0.3)
  Top 0.254: IC5.4 68.9,66.04 67.94,65.09 67.94,54.29 66.99,53.34 IC6.18 | v135.89,65.41 IC8.1 | v149.07,60.17 v149.07,53.34 | v149.07,53.34
  Bottom 0.254: IC5.4 83.98,66.04 84.93,65.09 106.05,65.09 106.68,65.72 133.51,65.72 133.83,66.04 135.25,66.04 v135.89,65.41 | IC8.1 140.81,62.23 142.08,60.96 148.27,60.96 v149.07,60.17 | v149.07,53.34 SV2.26
D4  (via drill 0.3)
  Top 0.254: IC5.3 69.69,68.58 67.47,66.36 67.47,58.1 65.25,55.88 IC6.19 | v148.27,67.15 v148.27,57.31
  Bottom 0.254: IC5.3 78.58,68.58 80.17,66.99 89.69,66.99 90.01,67.31 115.09,67.31 115.57,66.83 116.68,66.83 117.63,67.79 146.37,67.79 147,67.15 v148.27,67.15 | v148.27,57.31 148.43,57.15 153.67,57.15 SV2.27
D5  (via drill 0.3)
  Top 0.254: IC5.2 69.69,71.12 66.99,68.42 66.99,60.48 64.93,58.42 IC6.20 | v147.32,67.94 | v147.32,67.94 147.48,67.79 v147.48,56.04
  Bottom 0.254: v147.32,67.94 147,68.26 117.32,68.26 117.16,68.1 116.36,67.31 115.73,67.31 115.25,67.79 89.85,67.79 89.53,67.47 80.33,67.47 76.99,70.96 72.71,70.96 72.55,71.12 IC5.2 | v147.48,56.04 | v147.48,56.04 147.64,55.88 SV2.28
D6  (via drill 0.3)
  Top 0.254: IC5.1 69.85,73.66 66.52,70.33 66.52,62.71 64.77,60.96 IC6.21 | v147.96,69.53 147.96,68.42 148.91,67.47 148.91,61.44 150.02,60.33 150.02,59.69 v149.86,59.53 | v149.86,59.53 | v149.86,59.53 150.02,59.53
  Bottom 0.254: IC5.1 83.98,73.66 85.09,72.55 87.63,72.55 88.11,73.03 94.14,73.03 97.95,69.22 147.64,69.22 v147.96,69.53 | SV2.29 | SV2.29 153.83,59.53 v149.86,59.53
D7  (via drill 0.3)  (1 unrouted)
  Top 0.254: v84.14,64.45 84.14,70.33 84.93,71.12 IC5.39 | SV2.30 151.29,58.42 150.65,59.05 150.65,60.48 149.38,61.75 149.38,67.31 149.38,67.94 v148.75,68.74 | v148.75,68.74
  Bottom 0.254: IC6.22 68.9,63.5 69.85,64.45 v84.14,64.45 | IC5.39 90.49,71.12 92.87,68.74 v148.75,68.74
D8  (via drill 0.3)
  Top 0.254: IC9.11 115.57,36.83 116.05,37.31 v116.05,68.1 117.47,66.67 v118.27,66.67 | v139.54,51.44 | v139.54,51.44 139.7,51.59 139.7,59.53 139.38,59.85 139.38,65.88 v138.75,66.52
  Bottom 0.254: IC5.38 89.53,68.58 89.69,68.42 | 89.69,68.42 | 89.69,68.42 89.85,68.26 115.89,68.26 v116.05,68.1 | IC8.10 142.72,52.07 141.76,51.12 139.86,51.12 v139.54,51.44 | v138.75,66.52 | v138.75,66.52 138.43,66.83 118.43,66.83 v118.27,66.67
D9  (via drill 0.3)
  Top 0.254: v111.76,66.67 111.76,58.58 112.08,58.26 112.08,34.61 112.39,34.29 IC9.12 | v139.86,49.53 140.18,49.85 140.18,59.69 139.86,60.01 v139.86,66.99
  Bottom 0.254: IC5.37 90.81,66.04 91.44,66.67 v111.76,66.67 114.94,66.67 115.25,66.36 117,66.36 117.95,67.31 139.7,67.31 139.86,67.15 v139.86,66.99 | v139.86,49.53 IC8.9
D10  (via drill 0.3)
  Top 0.254: IC5.36 85.09,63.5 83.66,62.07 v83.66,57.15 83.66,52.23 83.03,51.59 83.03,38.89 82.71,38.58 82.71,35.56 83.82,34.45 v83.82,32.07
  Bottom 0.254: IC8.3 124.46,57.15 123.51,56.2 88.74,56.2 88.11,56.83 83.98,56.83 v83.66,57.15 | IC9.13 108.9,31.75 108.58,31.43 88.74,31.43 88.27,31.91 85.09,31.91 84.93,32.07 v83.82,32.07
D11  (via drill 0.3)
  Top 0.254: v88.74,60.17 88.11,60.8 | 88.11,60.8 | 88.11,60.8 87.95,60.96 IC5.35 | IC9.15 123.51,29.21 123.83,29.53 123.83,58.42 v124.3,58.9
  Bottom 0.254: IC8.2 133.51,59.69 132.4,60.8 124.14,60.8 | 124.14,60.8 89.38,60.8 v88.74,60.17 | v124.3,58.9 124.3,60.64 124.14,60.8
DOTCLK  (via drill 0.3)
  Top 0.254: SV1.19 79.38,5.08 78.74,5.71 v78.74,28.1 | v14.13,31.59 14.13,36.83 IC25.4 15.24,39.37 13.97,40.64 13.97,46.99 12.7,48.26 IC24.3
  Bottom 0.254: IC5.22 85.09,27.94 84.61,28.42 83.66,28.42 83.19,27.94 78.74,27.94 | 78.74,27.94 73.5,27.94 72.55,28.89 44.45,28.89 43.81,29.53 35.24,29.53 33.18,31.59 v14.13,31.59 | 78.74,27.94 v78.74,28.1
EXT-IN
  Top 0.406: C7.1 71.12,76.83 67.94,73.66 IC6.26
GND  (via drill 0.3, 0.6)
  other vias: 102.55,33.02 55.88,38.73 56.52,24.77 92.55,43.02 127,48.9 57.78,70.48
  pour Bottom: 0,100.33 160.02,100.33 160.02,0 0,0
  pour Top: 0,100.01 0,0 160.02,0 160.02,100.33 0,100.33
GR/W  (via drill 0.3)
  Top 0.254: SV1.20 80.01,11.91 v79.53,12.38 | IC9.27 120.81,59.69 119.7,58.58 119.7,28.57 120.65,27.62 v120.65,11.75
  Bottom 0.254: v79.53,12.38 81.76,12.38 82.23,11.91 82.87,11.91 83.03,12.06 120.33,12.06 v120.65,11.75
LUM_SYNC_OUT
  Top 0.406: X1.20 132.72,79.38 R10.1 R11.2
MA0  (via drill 0.3)
  Top 0.254: v89.85,56.83 89.53,56.52 89.53,33.18 v89.85,32.86 | v130.33,32.7 130.33,36.2 130.97,36.83 RN8.2
  Bottom 0.254: RN8.2 IC10.2 | IC19.3 90.17,57.15 v89.85,56.83 | IC5.24 89.69,33.02 v89.85,32.86 94.46,32.86 95.73,34.13 108.27,34.13 109.22,33.18 124.14,33.18 124.62,32.7 v130.33,32.7
MA1  (via drill 0.3)
  Top 0.254: v84.61,52.23 84.3,52.23 83.5,51.44 83.5,38.73 83.19,38.42 83.19,36.2 v83.82,35.56 | v95.25,39.37 95.57,39.69 95.57,49.37 95.09,49.85 v95.09,52.07
  Bottom 0.254: IC10.3 RN8.3 124.46,34.29 123.51,35.24 123.35,35.4 108.11,35.4 106.84,36.67 104.14,36.67 101.44,39.37 v95.25,39.37 | IC19.5 v95.09,52.07 84.77,52.07 v84.61,52.23 | v83.82,35.56 IC5.25
MA2  (via drill 0.3)
  Top 0.254: v84.14,46.51 84.14,38.42 v83.82,38.1 | v95.89,32.07 96.04,32.23 96.04,46.67 96.36,46.99 IC19.7
  Bottom 0.254: IC10.4 RN8.4 124.94,31.75 123.98,32.7 109.06,32.7 108.27,31.91 96.04,31.91 v95.89,32.07 | IC19.7 95.57,46.99 95.41,46.83 84.45,46.83 v84.14,46.51 | v83.82,38.1 IC5.26
MA3  (via drill 0.3)
  Top 0.254: IC19.9 v105.41,40.64 103.19,38.42 103.19,29.21 v102.87,28.89
  Bottom 0.254: IC10.5 RN8.5 124.14,29.21 123.19,30.16 108.74,30.16 107.47,28.89 v102.87,28.89 | IC5.27 v105.41,40.64
MA4  (via drill 0.3)
  Top 0.254: IC5.28 87.31,43.18 88.27,42.23 v88.27,35.56 v88.27,27.94 | v99.85,49.53 99.85,36.51 98.9,35.56 IC11.2
  Bottom 0.254: IC10.6 RN8.6 129.7,26.67 129.54,26.51 95.73,26.51 94.77,27.46 88.74,27.46 v88.27,27.94 | v88.27,35.56 IC11.2 | v99.85,49.53 IC19.11
MA5  (via drill 0.3)
  Top 0.254: v84.61,31.27 84.61,45.4 84.93,45.72 IC5.29 | v96.04,24.61 96.04,30.16 96.36,30.48 IC11.4 | v90.81,53.82 90.81,45.88 v90.65,45.72
  Bottom 0.254: IC10.7 RN8.7 130.97,24.13 130.65,24.45 96.2,24.45 v96.04,24.61 | IC11.4 89.06,30.48 88.11,31.43 84.77,31.43 v84.61,31.27 | IC19.13 103.19,54.61 102.23,53.66 90.96,53.66 v90.81,53.82 | IC5.29 v90.65,45.72
N$1
  Bottom 0.254: C2.1 IC6.1
N$2
  Bottom 0.254: C2.2 IC6.2
N$3
  Bottom 0.254: C1.2 IC6.4
N$4
  Bottom 0.254: C1.1 IC6.3
N$5
  Top 0.406: IC6.27 64.93,76.2 66.04,77.31 R2.2
N$6
  Top 0.406: R3.2 C4.+ 73.66,91.44 71.75,93.34 C32.1
  Bottom 0.406: Q1.1 74.93,86.36 R3.2
N$7
  Top 0.406: C3.1 C32.2
  Bottom 0.406: Q1.2 65.41,88.27 R2.1 C3.1
N$8
  Top 0.406: LED1.K R30.2
N$9
  Bottom 0.254: IC15.6 IC15.9
N$10
  Top 0.406: Q2.B R5.2 R4.2
N$11
  Top 0.406: Q2.E R6.2
N$12
  Top 0.406: C9.1 R6.1 R7.1
N$13
  Top 0.406: C9.2 R8.2
N$14
  Bottom 0.254: R1.S C34.1
N$15
  Top 0.406: D1.A R9.1 109.06,71.12 110.49,72.55 Q3.B
N$16
  Bottom 0.254: IC15.12 40.01,25.4 40.64,26.04 48.26,26.04 R1.A
N$17
  Top 0.254: IC25.10 22.86,50.16 17.14,55.88 R14.2
N$18
  Bottom 0.254: C16.1 R21.2
N$19
  Top 0.406: Q3.E 120.65,73.66 R10.2
N$20
  Bottom 0.406: R16.2 IC21.2 IC21.3 12.7,20.32 R17.2
N$21
  Bottom 0.406: IC21.1 R16.1 C12.1 Q4.1
N$22
  Bottom 0.254: Q4.2 17.78,12.83
  Bottom 0.406: 17.78,12.83 R17.1 | Q4.2 C13.1
N$25
  Bottom 0.254: IC24.2 10.16,59.05 10.79,58.42 19.68,58.42 20.32,59.05 IC24.6
N$26
  Top 0.254: IC22.11 IC22.12
N$28
  Bottom 0.254: IC24.12 12.7,66.67 13.34,66.04 22.23,66.04 22.86,66.67 IC24.8
N$31
  Top 0.254: IC24.11 15.24,66.67 17.78,64.14 IC24.5
N$33  (via drill 0.3)
  Top 0.254: IC25.3 12.7,40.64 11.43,41.91 v11.43,70.48
  Bottom 0.254: v11.43,70.48 19.68,70.48 20.32,69.85 IC24.9
N$35
  Top 0.254: R18.2 16.51,39.37 20.32,43.18 IC25.11
N$36
  Top 0.254: IC25.13 15.24,45.72 R20.2
N$37
  Bottom 0.254: IC25.12 17.78,45.72 R19.2
N$38
  Top 0.254: C14.1 20.32,34.29 IC25.6
N$39
  Top 0.254: C14.2 22.86,34.29 IC25.7
N$40
  Top 0.254: IC25.9 R20.1 R21.1 C15.1
PHI0  (via drill 0.3)
  Top 0.254: SV1.10 v67.31,21.11 67.31,31.75 68.58,33.02 IC5.17
  Bottom 0.254: IC15.5 32.86,21.43 66.99,21.43 v67.31,21.11
POTX  (via drill 0.3)
  Top 0.254: SV1.14 72.39,13.65 71.12,14.92 71.12,17.78 C6.1 | IC6.24 61.75,68.58 60.8,67.63 60.8,19.21 v60.64,18.89
  Bottom 0.254: v60.64,18.89 60.8,19.05 C6.1
POTY  (via drill 0.3)
  Top 0.254: v74.93,13.97 SV1.16 | IC6.23 61.59,66.04 61.28,65.72 61.28,15.56 v61.59,15.24
  Bottom 0.254: v74.93,13.97 74.61,13.65 72.23,13.65 71.75,14.13 70.96,14.13 C5.1 v61.59,15.24
R/W  (via drill 0.3)
  Top 0.254: v46.51,49.21 46.35,49.37 46.35,62.87 46.99,63.5 IC6.7 | v46.35,7.46 46.35,49.05 v46.51,49.21 | v46.51,49.21
  Bottom 0.254: IC5.11 66.2,48.26 65.25,49.21 v46.51,49.21 | SV1.3 59.69,5.87 59.21,6.35 47.47,6.35 v46.35,7.46
ROW4  (via drill 0.3)
  Top 0.254: v81.6,53.82 | v81.6,53.82 81.44,53.66 81.44,10.79 82.55,9.68 SV1.22
  Bottom 0.254: IC5.9 72.39,53.34 73.03,53.98 81.44,53.98 v81.6,53.82
SID_PHI2  (via drill 0.3)
  Top 0.254: IC6.6 46.35,66.04 45.88,65.56 45.88,15.56 v45.72,15.4 | v45.72,15.4
  Bottom 0.254: v45.72,15.4 45.56,15.24 IC15.8
SYNC  (via drill 0.3)
  Top 0.254: 72.87,38.1 IC5.15 | 72.87,38.1 73.98,38.1 74.93,39.05 74.93,71.91 v75.41,72.39 | v72.87,29.53 72.87,38.1
  Bottom 0.254: v75.41,72.39 75.41,72.23 75.72,72.07 91.76,72.07 D1.C | C34.2 | C34.2 55.09,29.37 72.71,29.37 v72.87,29.53
V9
  Top 0.813: JP2.3 IC18.OUT
  Bottom 0.813: JP2.3 C36.+
V12  (via drill 0.6)
  Top 0.813: JP1.1 Q1.3 | 44.45,92.08 IC18.IN JP2.1 | v31.27,91.44 25.72,91.44 25.56,91.6
  Top 1.676: J2.3 15.7,90.63 16.51,91.44 19.05,91.44 | 19.05,91.44 C8.1 25.4,91.44 25.56,91.6 IC26.1 | C18.+ 18.29,92.2 19.05,91.44
  Bottom 0.813: JP1.1 56.04,93.98 53.34,91.28 45.24,91.28 44.45,92.08 IC18.IN 38.1,93.98 35.56,91.44 v31.27,91.44
V_SID  (via drill 0.6)
  Top 1.27: v53.18,78.74 53.02,78.74 46.99,84.77 JP2.2
  Bottom 1.27: C28.1 IC6.28 v53.18,78.74
V_VIC  (via drill 0.6)
  Top 0.813: JP1.2 62.23,88.9 63.66,87.47 63.66,85.57 60.64,82.55 v60.64,77.31 | v56.04,77.31 56.04,45.09 v56.04,43.02
  Bottom 0.813: IC5.13 67.15,43.18 C27.2 66.67,43.02 v56.04,43.02 | v56.04,77.31 v60.64,77.31
VA14
  Bottom 0.254: IC15.2 33.34,27.94 | IC11.6 96.2,25.4 94.61,26.99 34.29,26.99 33.34,27.94 | 33.34,27.94
VA15
  Bottom 0.254: IC15.4 33.18,22.86 34.13,21.91 103.03,21.91 103.82,22.7 | 103.82,22.7 | 103.82,22.7 103.98,22.86 IC11.10
VCC  (via drill 0.6)
  Top 0.254: 1.91,75.09 2.06,74.93 | 29.21,48.42 29.37,48.26 | IC22.10 40.8,40.64 41.12,40.32 41.12,30.96 40.64,30.48 IC15.14 | 1.75,60.33 IC24.1
  Top 0.406: 29.37,48.26 IC22.4 | R9.2 Q3.C | LED1.A 1.91,73.03 1.91,73.66
  Top 1.016: IC19.16 107.79,62.23 107.79,38.1 | 107.79,38.1 IC11.16 107.79,38.1 | 107.79,38.1 107.79,16.35 | 111.76,16.35 107.95,16.35 106.84,15.24 | IC8.14 146.05,62.23 146.05,39.37 IC10.20 142.24,40.64 C23.1
  Top 1.27: 1.75,29.69 1.75,44.45 | 1.75,29.69 2.22,29.21 3.81,29.21 | 3.81,29.21 IC21.14 | 1.75,44.45 3.81,44.45 | 3.81,44.45 IC25.16 | 29.21,55.72 29.21,48.42 29.21,34.29 C25.1 | 29.21,55.72 29.37,55.88 IC22.1 32.86,55.88 33.02,56.04 C20.1 | C25.1 | 86.36,80.01 IC5.40 | 86.36,80.01 C24.1 | IC6.25 61.44,71.12 57.47,75.09 57.47,82.55 | 57.47,98.11 57.47,82.55 | 57.47,82.55 C26.1 | 107.79,16.35 107.95,16.35 | 111.76,16.35 IC14.14 | 106.84,15.24 C29.1 | 86.36,80.01 | 86.36,80.01 84.93,81.44 84.93,97.95 84.77,98.11 | IC9.28 v121.92,64.14 121.92,69.22 C22.1 | C33.+ 1.75,21.34 1.75,29.69 | 1.75,44.45 1.75,60.33 1.75,67.94 | 1.75,67.94 1.75,73.5 1.91,73.66 | 3.81,29.21 C19.1 | 3.81,44.45 C21.1 | 29.21,55.72 29.21,83.31 C11.+ | 1.75,67.94 3.81,67.94 | 3.81,67.94 IC24.14 | 3.81,67.94 C17.1
  Top 1.676: 33.02,98.11 IC26.3 33.02,88.9 | 33.02,98.11 57.47,98.11 64.77,98.11 | 64.77,98.11 JP1.3 | 33.02,88.9 33.02,87.12 C11.+ | 158.12,74.61 158.12,84.77 144.78,98.11 84.77,98.11 64.77,98.11 | 158.12,69.53 158.12,63.5 | 158.12,63.5 158.12,60.96 SV2.31 SV2.32 | 33.02,98.11 11.59,98.11 10.16,96.68 10.16,93.03 7.3,90.17 3.17,90.17 1.91,88.9 1.91,75.09 1.91,73.66 | 158.12,69.53 C30.1 | 33.02,88.9 C10.2 | 158.12,74.61 C31.+ | 158.12,74.61 158.12,69.53 | SV2.34 SV2.33 158.12,63.5
  Bottom 0.254: IC15.14 R12.1 | RN8.1 133.03,40.32 142.56,40.32 IC10.20 | IC24.14 IC24.13 10.16,69.22 10.79,69.85 17.14,69.85 17.78,69.22 IC24.10 | IC24.1 7.62,61.59 8.26,62.23 14.61,62.23 15.24,61.59 IC24.4
  Bottom 0.406: IC22.16 IC22.15 | IC5.40 Q2.C R9.2 | RN4.1 87.63,15.4 89.06,16.83 100.17,16.83 | 100.17,16.83 106.52,16.83 106.68,16.67 C29.1 | C29.1 | R13.1 100.33,16.67 100.17,16.83
  Bottom 1.27: IC15.14 36.83,30.48 C25.1 | IC19.16 107.31,64.14 v121.92,64.14 141.6,64.14 IC8.14 148.91,62.23 150.18,60.96 SV2.32 | IC22.1 IC22.16

## Text on the board
tPlace: 12V | 5V | VIC voltage | 12V | 9V | SID voltage | 12V | power | SID | color RAM | luma fix | VIC-II | SPC64 2019 b1